# Altium PCB Arduino mega 2650  custom shield.pcbdoc
Units mm, origin at the board's own origin, x right, y up, seen from the top; angles counter-clockwise.
Board outline 114.55 x 86.11 mm, 2 copper layers (Top Layer, Bottom Layer); 28 components, 26 nets, 179 pads, 51 vias.
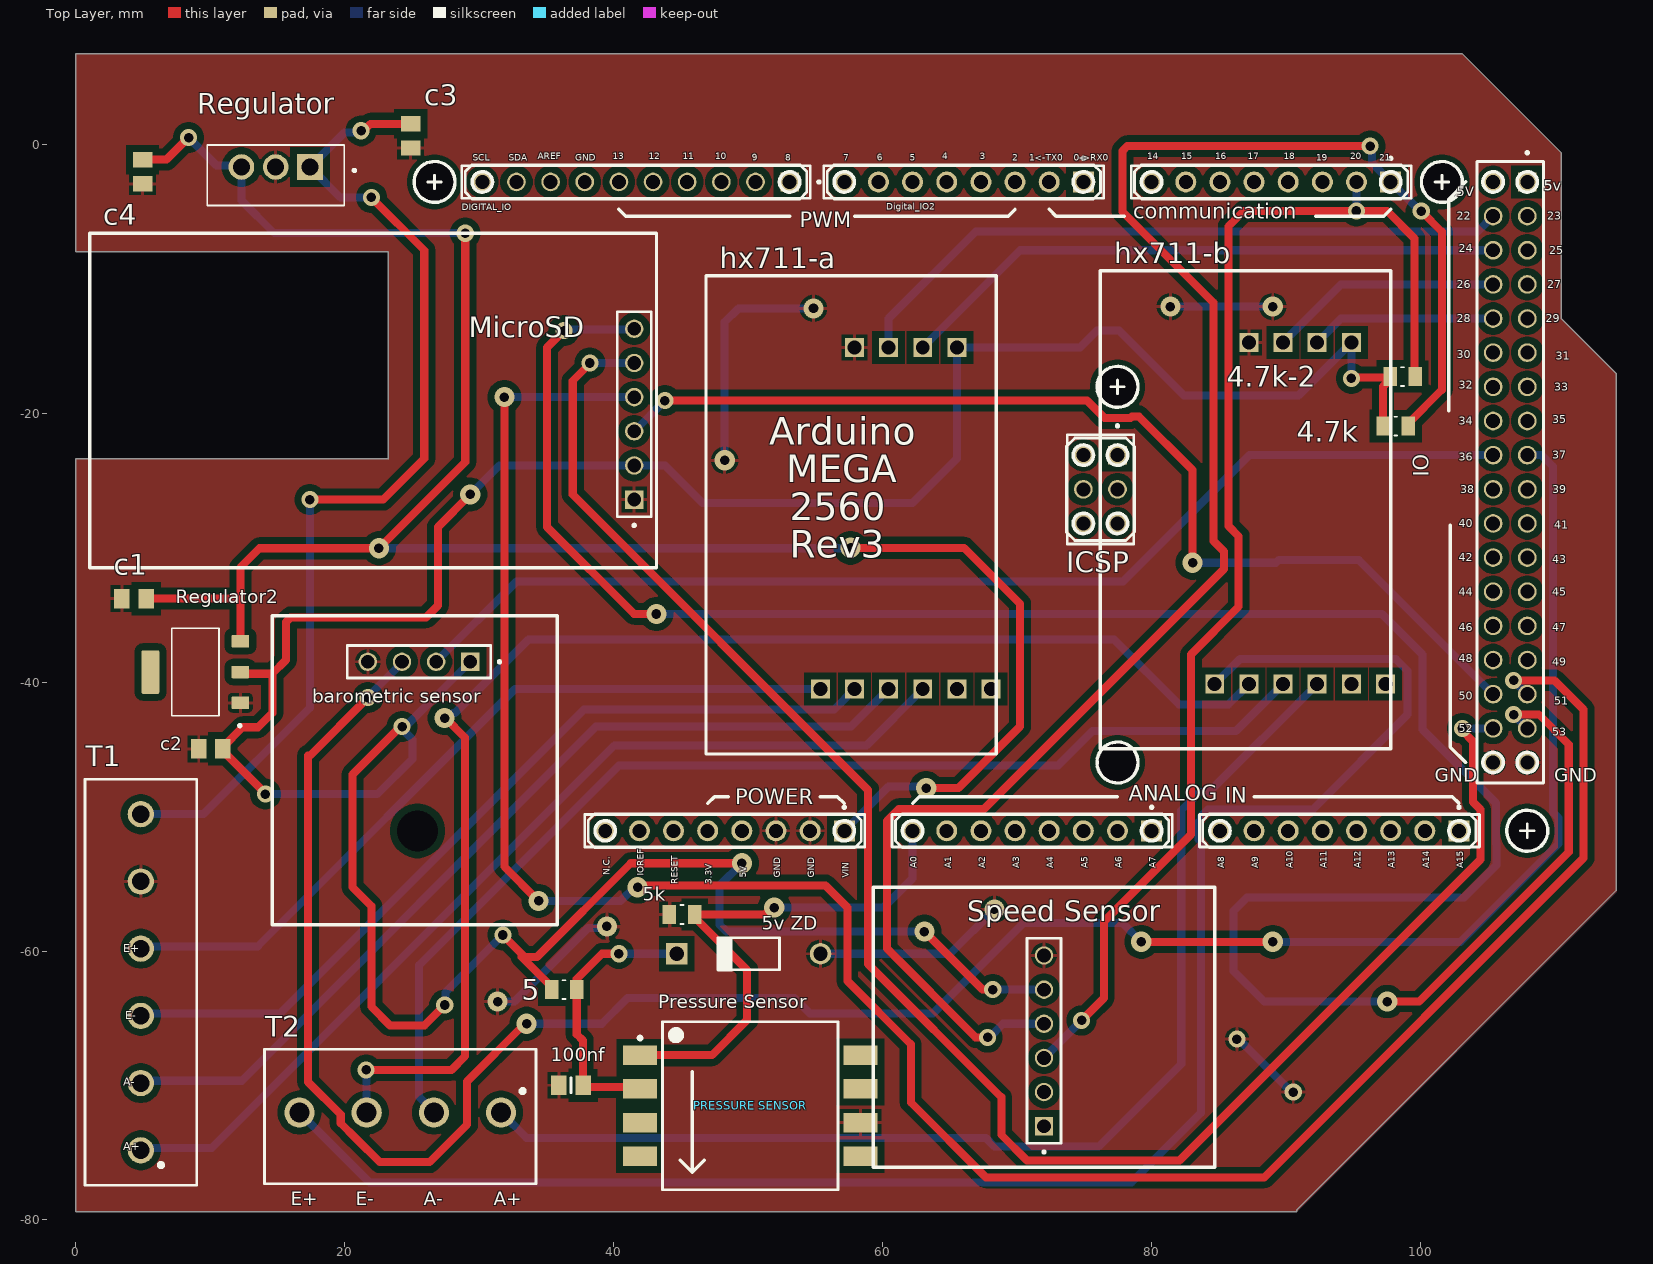
[diagram p0: Top Layer view]
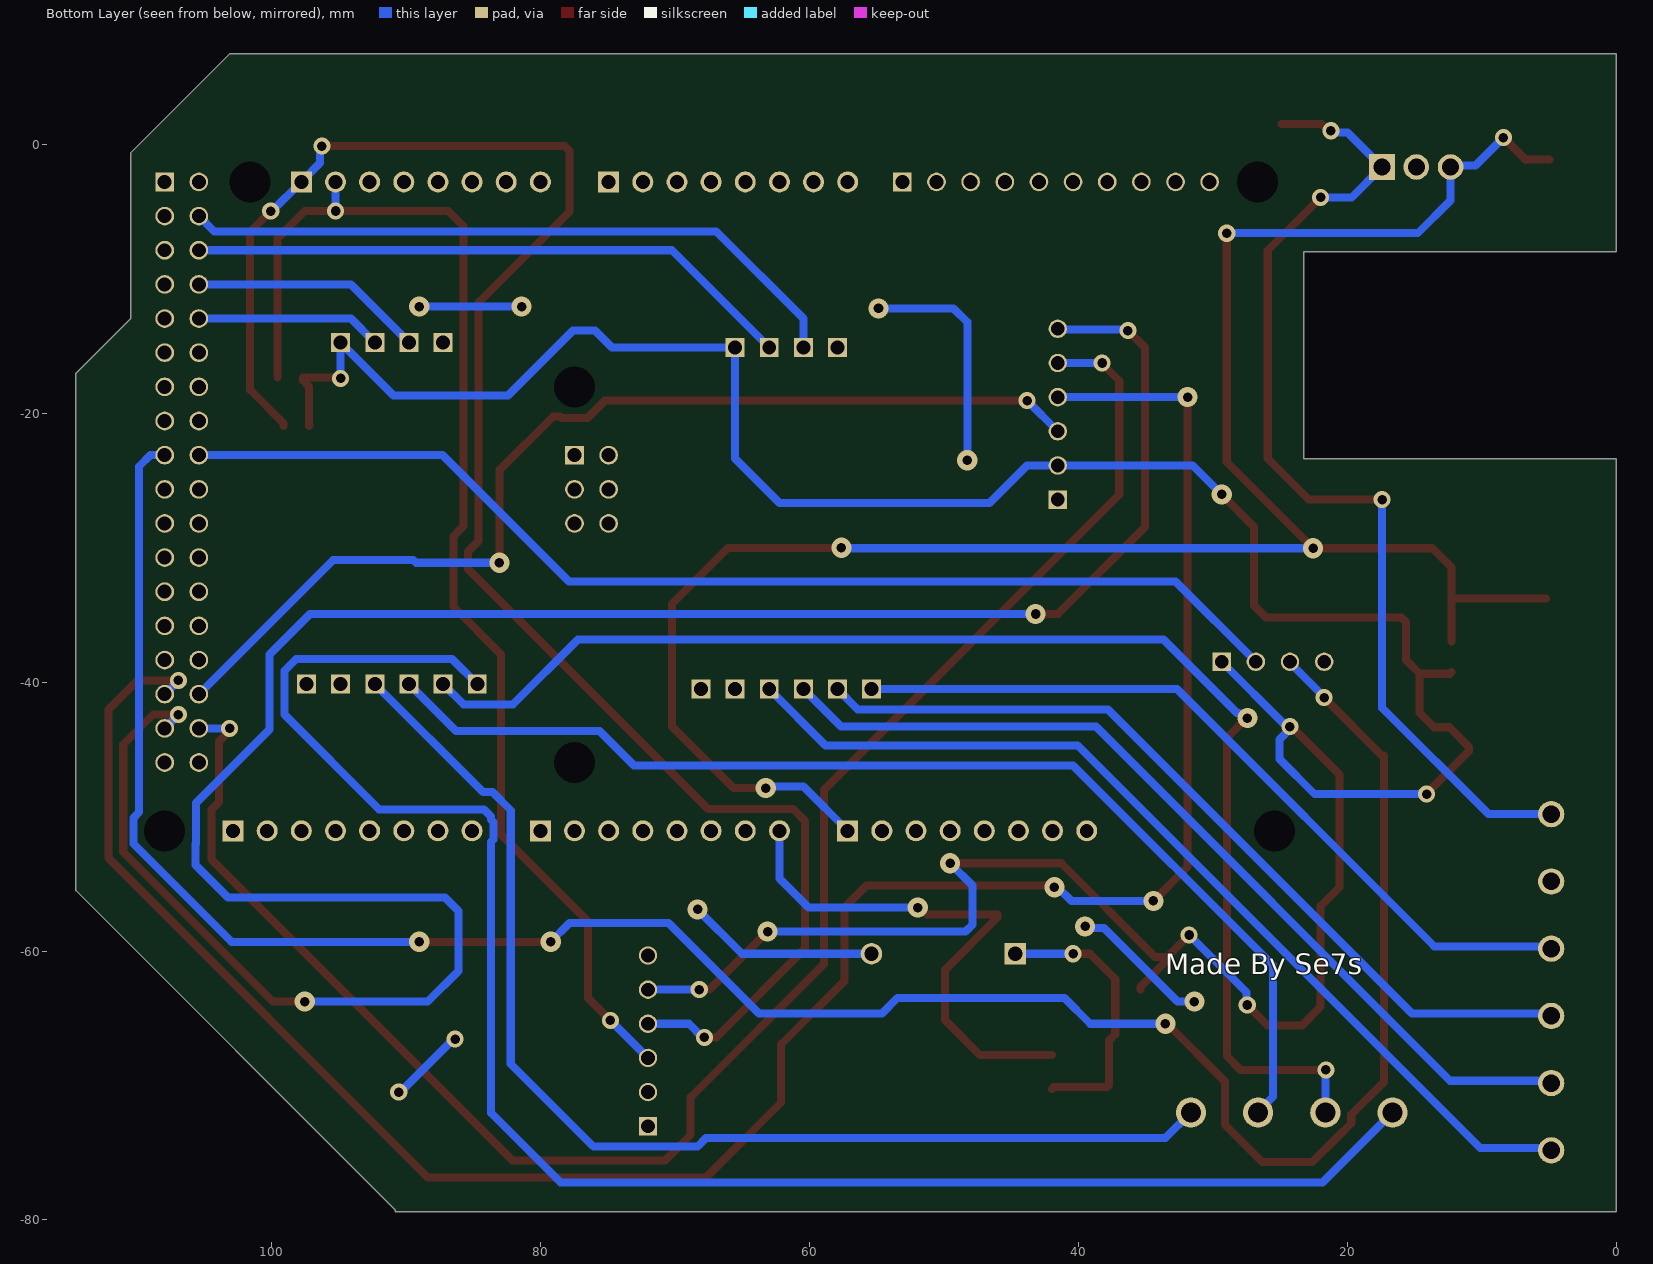
[diagram p1: Bottom Layer view, seen from below]
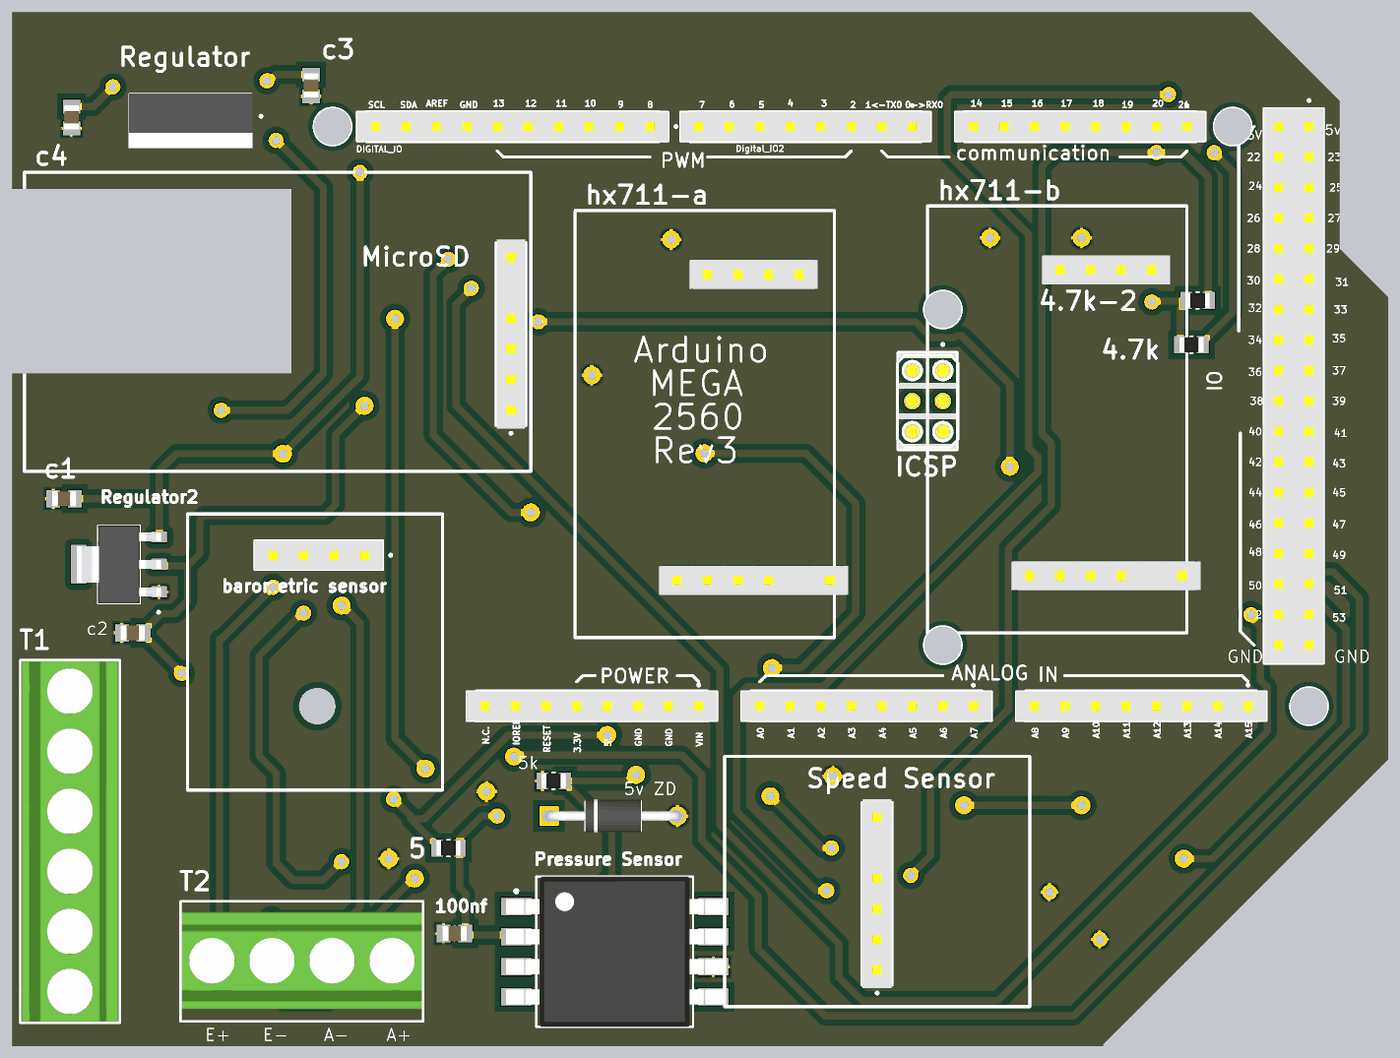
[diagram p2: 3D render of the assembled board from above, using the file's embedded part models]

## Layer stack, top to bottom
Top Solder: solder mask 0.0102, Solder Resist, Dk 3.5
Top Layer: signal copper 0.0356
Dielectric1: dielectric 0.32, FR-4, Dk 4.8
Bottom Layer: signal copper 0.0356
Bottom Solder: solder mask 0.0102, Solder Resist, Dk 3.5

## Board outline
0,6.731 103.124,6.731 110.49,-0.635 110.49,-12.948 110.484,-12.954 114.548,-17.018 114.554,-17.018 114.554,-55.499 90.805,-79.248 90.805,-79.375 0,-79.375 0,-23.368 23.241,-23.368 23.241,-8.001 0,-8.001

## Design rules (kind name [scope] priority, off if disabled: settings)
Clearance [All] p1: gap=0.5 ignorepadtopadclearanceinfootprint=FALSE
PolygonConnect [All] p1: connectstyle=Relief reliefconductorwidth=0.254 reliefentries=4 polygonreliefangle="90 Angle" airgapwidth=0.254
RoutingVias [All] p1: holewidth=0.4 width=1.5 viastyle="Through Hole" minholewidth=0.4 minwidth=1.5 maxholewidth=0.4 maxwidth=1.5
SolderMaskExpansion [All] p1: expansion=0.102 istentingtop=FALSE
Width [All] p1: maxlimit=0.6 minlimit=0.6 preferedwidth=0.6 minimp=50.000000 maximp=50.000000 favimp=50.000000
30 further rules are at their usual default settings.

## Components (designator, comment, footprint, x,y, rotation, side; value= is the part's Value field where it differs from the comment)
4.7k "" RESC2012X60N 98.165,-20.955 r180 top
4.7k-2 "" RESC2012X60N 98.679,-17.272 r180 top
5 "" RESC2012X60N 36.316,-62.865 r0 top
5k "" RESC2012X60N 45.079,-57.277 r180 top
"5v ZD" "1N4734A_T50R" DIOAD1070W78L463D238P 50.032,-60.198 r0 top
100nf "" CAPC2012X140N 36.824,-69.977 r180 top
ANALOG "" SAMTEC_SSW-108-XX-X-S 71.12,-51.051 r180 top
"barometric sensor" "SSQ-104-01-T-S-LL" SAMTEC_SSQ-104-01-T-S-LL 25.521,-38.481 r180 top
c1 "22u" CAPC2012X140N 4.318,-33.782 r0 top
c2 "22u" CAPC2012X140N 10.033,-44.958 r0 top
c3 "0.33u" CAPC2012X140N 24.892,0.635 r90 top
c4 "0.1u" CAPC2012X140N 4.953,-2.032 r270 top
communication "" SAMTEC_SSW-108-XX-X-S 88.9,-2.791 r180 top
DIGITAL_IO "" SAMTEC_SSW-110-03-T-S 53.086,-2.791 r180 top
Digital_IO2 "" SAMTEC_SSW-108-XX-X-S 66.04,-2.791 r180 top
hx711-a "HX711A" HX711 84.576,-49.403 r90 top
hx711-b "HX711A" HX711 113.913,-49.022 r90 top
ICSP "" SAMTEC_SSW-103-03-T-D 77.47,-23.111 r90 top
IN "" SAMTEC_SSW-108-XX-X-S 93.98,-51.051 r180 top
IO "" SAMTEC_SSW-118-03-T-D 107.95,-2.791 r90 top
MicroSD "MTSW-106-12-L-S-790" SAMTEC_MTSW-106-12-L-S-790 41.523,-20.066 r270 top
POWER "SSW-108-XX-X-S" SAMTEC_SSW-108-XX-X-S 48.26,-51.051 r180 top
"PRESSURE SENSOR" "" SOP251P1810X750-8N 50.159,-71.501 r0 top
Regulator "Component_1" TO225P1040X460X1968-3 14.859,-2.286 r180 top
Regulator2 "AMS1117-5.0" SOT229P700X180-4N 8.89,-39.243 r90 top
"Speed Sensor" "MTSW-106-12-L-S-790" SAMTEC_MTSW-106-12-L-S-790 72.003,-66.675 r270 top
T1 "691241710006" 691241710006 4.826,-62.317 r90 top
T2 "691242710004" 691242710004 24.124,-72.009 r180 top

## Footprints (in the part's own frame and the unit in brackets; to place one, negate y for a bottom-side part, rotate by r counter-clockwise, add the part's x,y. Pads: shape width x height; smd on the part's side, far side on the other; paste and mask are expansions set on the pad)
691241710006 [mm]
  round 1.95 hole 1.3: 1(-12.5,0) 2(-7.5,0) 3(-2.5,0) 4(2.5,0) 5(7.5,0) 6(12.5,0)
  silkscreen extent -15.1,-4.15 15.1,4.15, body extent -14.99,-4.04 15.01,4.06, height 10
691242710004 [mm]
  round 2.25 hole 1.5: 1(-7.5,0) 2(-2.5,0) 3(2.5,0) 4(7.5,0)
  silkscreen extent -10.1,-4.7 10.1,5.3, body extent -10,-3.81 10,4.29, height 10
CAPC2012X140N [mm]
  rect 1.15x1.45 smd: 1(-0.9,0) 2(0.9,0)
  silkscreen extent 0,-0.55 0,0.55, body extent -1,-0.63 1,0.63, height 0.94
DIOAD1070W78L463D238P [mm]
  round 1.6 hole 1.06: A(5.35,0)
  rect 1.6x1.6 hole 1.06: C(-5.35,0)
  silkscreen extent -2.31,-1.3 2.3,1.2, body extent -5.69,-1.36 5.69,1.36, height 2.71
HX711 [mm]
  rect 1.408x1.408 / inner round 1.301 / far side rect 1.408x1.408 hole 1.04: 2(8.89,16.51) A+(8.89,21.59) A-(8.89,24.13) B-(8.89,19.05) DT(34.29,24.13) E+(8.89,29.21) E-(8.89,26.67) GND(34.29,26.67) SCK(34.29,21.59) VCC(34.29,19.05)
  body extent 7.62,14.99 35.5,30.73, height 8.51
RESC2012X60N [mm]
  rect 1x1.42 smd: 1(-0.935,0) 2(0.935,0)
  silkscreen extent -0.12,-0.7 0.12,0.7, body extent -1,-0.63 1,0.63, height 0.6
SAMTEC_MTSW-106-12-L-S-790 [mm]
  rect 1.37x1.37 / inner round 1.37 / far side rect 1.37x1.37 hole 1.02: 01(6.35,0)
  round 1.37 hole 1.02: 02(3.81,0) 03(1.27,0) 04(-1.27,0) 05(-3.81,0) 06(-6.35,0)
  silkscreen extent -7.62,-1.27 8.37,1.27, body extent -7.87,-1.21 7.87,1.21, height 8.51
SAMTEC_SSQ-104-01-T-S-LL [mm]
  rect 1.37x1.37 / inner round 1.37 / far side rect 1.37x1.37 hole 1.02: 01(-3.81,0)
  round 1.37 hole 1.02: 02(-1.27,0) 03(1.27,0) 04(3.81,0)
  silkscreen extent -6.08,-1.21 5.34,1.21, body extent -5.33,-1.21 5.33,1.21, height 8.51
SAMTEC_SSW-103-03-T-D [mm]
  rect 1.39x1.39 hole 1.04: 01(0,0)
  round 1.39 hole 1.04: 02(0,2.54) 03(-2.54,0) 04(-2.54,2.54) 05(-5.08,0) 06(-5.08,2.54)
  silkscreen extent -6.61,-1.21 2.27,3.75, body extent -6.6,-1.21 1.52,3.75, height 10.01
SAMTEC_SSW-108-XX-X-S [mm]
  rect 1.56x1.56 hole 1.04: 01(-8.89,0)
  round 1.56 hole 1.04: 02(-6.35,0) 03(-3.81,0) 04(-1.27,0) 05(1.27,0) 06(3.81,0) 07(6.35,0) 08(8.89,0)
  silkscreen extent -10.42,-1.85 10.42,1.2, body extent -10.41,-1.21 10.41,1.21, height 8.51
SAMTEC_SSW-110-03-T-S [mm]
  rect 1.39x1.39 hole 1.04: 01(0,0)
  round 1.39 hole 1.04: 02(2.54,0) 03(5.08,0) 04(7.62,0) 05(10.16,0) 06(12.7,0) 07(15.24,0) 08(17.78,0) 09(20.32,0) 10(22.86,0)
  silkscreen extent -2.27,-1.21 24.39,1.21, body extent -1.52,-1.21 24.38,1.21, height 8.51
SAMTEC_SSW-118-03-T-D [mm]
  rect 1.39x1.39 / inner round 1.39 / far side rect 1.39x1.39 hole 1.04: 01(0,0)
  round 1.39 hole 1.04: 02(0,2.54) 03(-2.54,0) 04(-2.54,2.54) 05(-5.08,0) 06(-5.08,2.54) 07(-7.62,0) 08(-7.62,2.54) 09(-10.16,0) 10(-10.16,2.54) 11(-12.7,0) 12(-12.7,2.54) 13(-15.24,0) 14(-15.24,2.54) 15(-17.78,0) 16(-17.78,2.54) 17(-20.32,0) 18(-20.32,2.54) 19(-22.86,0) 20(-22.86,2.54) 21(-25.4,0) 22(-25.4,2.54) 23(-27.94,0) 24(-27.94,2.54) 25(-30.48,0) 26(-30.48,2.54) 27(-33.02,0) 28(-33.02,2.54) 29(-35.56,0) 30(-35.56,2.54) 31(-38.1,0) 32(-38.1,2.54) 33(-40.64,0) 34(-40.64,2.54) 35(-43.18,0) 36(-43.18,2.54)
  silkscreen extent -44.71,-1.21 2.27,3.75, body extent -44.7,-1.21 1.52,3.75, height 8.51
SOP251P1810X750-8N [mm] "SOP, 8-Leads, Body 12.25x12.25mm, Pitch 2.51mm, IPC Medium Density"
  rect 2.55x1.45 smd: 1(8.2,-3.759) 2(8.2,-1.253) 3(8.2,1.253) 4(8.2,3.759) 5(-8.2,-3.759) 6(-8.2,-1.253) 7(-8.2,1.253) 8(-8.2,3.759)
  silkscreen extent -8.32,-6.25 6.53,6.25, body extent -9.05,-6.25 9.05,6.25, height 7.5
SOT229P700X180-4N [mm]
  rrect15% 0.93x1.31 smd: 1(-2.29,-3.345) 2(0,-3.345) 3(2.29,-3.345)
  rrect15% 3.24x1.31 smd: 4(0,3.345)
  silkscreen extent -4.09,-3.4 3.25,1.75, body extent -3.25,-3.5 3.25,3.5, height 1.8
TO225P1040X460X1968-3 [mm]
  rect 1.905x1.905 / inner round 1.905 / far side rect 1.905x1.905 hole 1.27: 1(-2.55,-0.605)
  round 1.905 hole 1.27: 2(0,-0.605) 3(2.55,-0.605)
  silkscreen extent -5.95,-2.25 5.1,2.25, body extent -5.15,-2.29 5.15,2.29, height 22.22

## Part data
4.7k 4.7k-2 5 5k: library part CR0805-FX-2001ELF, "Res 0805 2k 1% 125mW", Package="0805 Bourns", Check_prices=https://www.snapeda.com/parts/CR0805-FX-2001ELF/Bourns/view-part/?ref=eda, MF=Bourns, MP=CR0805-FX-2001ELF, SnapEDA_Link=https://www.snapeda.com/parts/CR0805-FX-2001ELF/Bourns/view-part/?ref=snap
"5v ZD": "1N4734 Series 1 W 5.6 V 10 uA Through Hole Zener Diode - DO-41", Package=None, Availability=Unavailable, MP=1N4734A_T50R, Price=None
100nf: library part LD052C153JAB2A, "Ceramic Capacitor", Package="0805 AVX", Availability="In Stock", Check_prices=https://www.snapeda.com/parts/LD052C153JAB2A/AVX/view-part/?ref=eda, MF=AVX, MP=LD052C153JAB2A, Price=None, SnapEDA_Link=https://www.snapeda.com/parts/LD052C153JAB2A/AVX/view-part/?ref=snap
ANALOG communication Digital_IO2 IN: library part SSW-108-XX-X-S, "8 Position Receptacle Connector Through Hole, Right Angle", Package=None, Availability=Bad, Check_prices=https://www.snapeda.com/parts/SSW-108-03-F-S/Samtec/view-part/3433832/?ref=eda, MF=Samtec, MP=SSW-108-03-F-S, Price=None, Purchase-URL=https://pricing.snapeda.com/search/part/SSW-108-03-F-S/?ref=eda, SnapEDA_Link=https://www.snapeda.com/parts/SSW-108-03-F-S/Samtec/view-part/3433832/?ref=snap
"barometric sensor": "4 Position Receptacle Connector 0.100 (2.54mm) Through Hole Tin", Package=None, Check_prices=https://www.snapeda.com/parts/SSQ-104-01-T-S-LL/Samtec/view-part/?ref=eda, MF=Samtec, MP=SSQ-104-01-T-S-LL, SnapEDA_Link=https://www.snapeda.com/parts/SSQ-104-01-T-S-LL/Samtec/view-part/?ref=snap
c1 c2 c3 c4: library part LD051A121KAB2A, "Ceramic Capacitor", Package="0805 AVX", Availability="In Stock", Check_prices=https://www.snapeda.com/parts/LD051A121KAB2A/AVX/view-part/?ref=eda, MF=AVX, MP=LD051A121KAB2A, Price=None, Purchase-URL=https://pricing.snapeda.com/search/part/LD051A121KAB2A/?ref=eda, SnapEDA_Link=https://www.snapeda.com/parts/LD051A121KAB2A/AVX/view-part/?ref=snap
DIGITAL_IO: library part SSW-110-03-T-S, Package=None, Availability=Unavailable, MF=Samtec, MP=SSW-110-03-T-S, Price=None
hx711-a hx711-b: Package=HX711, DeviceName=A, DeviceSetName=HX711, GateName_1=G$1, LibraryName=HX711, SymbolName_1=HX711
ICSP: library part SSW-103-03-T-D, "SSW Series .100 Tiger Buyâ„¢ Socket Strip", Package=None, Availability="In Stock", Check_prices=https://www.snapeda.com/parts/SSW-103-03-T-D/Samtec/view-part/?ref=eda, MF=Samtec, MP=SSW-103-03-T-D, Price=None, Purchase-URL=https://pricing.snapeda.com/search/part/SSW-103-03-T-D/?ref=eda, SnapEDA_Link=https://www.snapeda.com/parts/SSW-103-03-T-D/Samtec/view-part/?ref=snap
IO: library part SSW-118-03-T-D, "36 Position Receptacle Connector 0.100 (2.54mm) Through Hole, Right Angle Tin", Package=None, Availability="In Stock", Check_prices=https://www.snapeda.com/parts/SSW-118-03-T-D/Samtec/view-part/?ref=eda, MF=Samtec, MP=SSW-118-03-T-D, Price=None, Purchase-URL=https://pricing.snapeda.com/search/part/SSW-118-03-T-D/?ref=eda, SnapEDA_Link=https://www.snapeda.com/parts/SSW-118-03-T-D/Samtec/view-part/?ref=snap
MicroSD "Speed Sensor": "HEADER, 6 CONTACTS, 1 ROW, THROUGH HOLE, 2.54 MM; Connector Systems:Board-to-Board; Pitch Spacing:2.54mm; No. of Rows:1Rows; No. of Contacts:6Contacts; Contact Termination Type:Through Hole; Product Range:MTSW Series; Gender:Header RoHS Compliant: Yes", Package=None, Availability="In Stock", Check_prices=https://www.snapeda.com/parts/MTSW10612LS790/Samtec/view-part/?ref=eda, MF=Samtec, MP=MTSW10612LS790, Price=None, Purchase-URL=https://pricing.snapeda.com/search/part/MTSW10612LS790/?ref=eda, SnapEDA_Link=https://www.snapeda.com/parts/MTSW10612LS790/Samtec/view-part/?ref=snap
POWER: "8 Position Receptacle Connector Through Hole, Right Angle", Package=None, Availability=Bad, Check_prices=https://www.snapeda.com/parts/SSW-108-03-F-S/Samtec/view-part/3433832/?ref=eda, MF=Samtec, MP=SSW-108-03-F-S, Price=None, Purchase-URL=https://pricing.snapeda.com/search/part/SSW-108-03-F-S/?ref=eda, SnapEDA_Link=https://www.snapeda.com/parts/SSW-108-03-F-S/Samtec/view-part/3433832/?ref=snap
"PRESSURE SENSOR": library part "PRESSURE SENSOR"
Regulator2: "1A LOW DROPOUT VOLTAGE REGULATOR", Package="SOT-223 Seeed Technology", Availability="Not in stock", Check_prices=https://www.snapeda.com/parts/AMS1117-5.0/ams/view-part/?ref=eda, MF=ams, MP=AMS1117-5.0, Price=None, SnapEDA_Link=https://www.snapeda.com/parts/AMS1117-5.0/ams/view-part/?ref=snap
T1: "6 Position Wire to Board Terminal Block Horizontal with Board 0.197 (5.00mm) Through Hole", Package=None, Check_prices=https://www.snapeda.com/parts/691241710006/Wurth+Elektronik/view-part/?ref=eda, MF="WÃ¼rth Elektronik", MP=691241710006, SnapEDA_Link=https://www.snapeda.com/parts/691241710006/Wurth+Elektronik/view-part/?ref=snap
T2: "4 Position Wire to Board Terminal Block Horizontal with Board 0.197 (5.00mm) Through Hole", Package=None, Check_prices=https://www.snapeda.com/parts/691242710004/Wurth+Elektronik/view-part/?ref=eda, MF="Wurth Electronics", MP=691242710004, SnapEDA_Link=https://www.snapeda.com/parts/691242710004/Wurth+Elektronik/view-part/?ref=snap

## Free pads (board coordinates)
  round 1.524 hole 3.048 unplated: 1(107.95,-51.051) 2(25.4,-51.054) 3(26.67,-2.791) 4(101.6,-2.791) 5(77.47,-18.031) 6(77.47,-45.971)

## Via types
v1: diameter 1.27, hole 0.711, Top Layer to Bottom Layer, 27 vias
v2: diameter 1.5, hole 0.711, Top Layer to Bottom Layer, 24 vias

## Nets (pads, with @x,y where several pads share a name; then routed paths per layer and width w, separated by ;. In a path a pad name is that pad's centre, name@x,y a point inside that pad or via, vN(x,y) a via of type N, cw(c..) or ccw(c..) an arc to the next point about the centre after c; other vN are vias at no path point)
+5: 4.7k-2.2 4.7k.2 5.1 "barometric sensor.01" "Speed Sensor.05" c2.2 hx711-a.VCC hx711-b.VCC MicroSD.02 Regulator2.2 | length 245.7
  Top Layer w0.6: Regulator2.2 12.362,-39.37 14.605,-39.37 ; v1@14.097,-48.387 v1(14.097,-48.329) 14.097,-48.272 10.933,-45.108 c2.2 10.933,-44.808 12.393,-43.348 13.548,-43.348 14.605,-42.291 14.605,-39.37 ; v1(24.257,-43.307) 24.13,-43.307 20.574,-46.863 20.574,-55.245 21.971,-56.642 21.971,-64.132 23.368,-65.529 25.911,-65.529 v1(27.432,-64.008) ; v2(29.331,-26.035) 29.331,-26.041 26.924,-28.448 26.924,-34.284 26.029,-35.179 15.972,-35.179 15.621,-35.53 15.621,-38.354 14.605,-39.37 ; v1(31.75,-58.801) 33.159,-60.21 33.159,-60.433 ; 5.1 35.381,-62.655 33.159,-60.433 ; v2(49.53,-53.461) 49.524,-53.467 41.269,-53.467 34.302,-60.433 33.159,-60.433 ; v2(63.113,-58.547) 67.431,-62.865 v1(68.193,-62.865) ; v1(94.869,-17.399) 94.932,-17.335 97.681,-17.335 97.681,-17.545 97.23,-17.996 4.7k.2 4.7k.2@97.166,-20.892
  Bottom Layer w0.6: v1(14.097,-48.329) 22.41,-48.329 25.024,-45.715 25.024,-44.256 24.257,-43.488 v1(24.257,-43.307) 24.385,-43.179 24.633,-43.179 29.331,-38.481 ; v1(27.432,-64.008) 27.473,-63.967 27.473,-63.078 v1(31.75,-58.801) ; v2(29.331,-26.035) 31.49,-23.876 MicroSD.02 43.809,-23.876 46.603,-26.67 62.224,-26.67 65.526,-23.368 hx711-a.VCC 74.67,-15.113 75.94,-13.843 77.591,-13.843 82.417,-18.669 90.926,-18.669 hx711-b.VCC 94.863,-17.393 v1(94.869,-17.399) ; v2(49.53,-53.461) 47.873,-55.118 47.873,-58.039 48.381,-58.547 v2(63.113,-58.547) ; v1(68.193,-62.865) 72.003,-62.865
+12: c3.2 Regulator.1 T1.6 | length 76.5
  Top Layer w0.6: v1(17.399,-26.416) 22.86,-26.416 25.908,-23.368 25.908,-7.874 v1(21.971,-3.937) ; v1(21.209,1.016) 21.39,1.016 21.909,1.535 c3.2
  Bottom Layer w0.6: T1.6 4.84,-49.803 9.5,-49.803 17.399,-41.904 v1(17.399,-26.416) ; v1(21.209,1.016) 21.081,0.888 19.978,0.888 Regulator.1 19.665,-3.937 v1(21.971,-3.937)
A+1: hx711-a.A+ T1.1 | length 72.4
  Bottom Layer w0.6: T1.1 5,-74.643 10.103,-74.643 40.042,-44.704 58.795,-44.704 hx711-a.A+
A+2: hx711-b.A+ T2.1 | length 87.1
  Bottom Layer w0.6: T2.1 33.529,-73.914 67.685,-73.914 68.32,-74.549 76.067,-74.549 82.212,-68.404 82.212,-49.527 83.566,-48.172 84.282,-48.172 hx711-b.A+
A-1: hx711-a.A- T1.2 | length 67.8
  Bottom Layer w0.6: T1.2 5,-69.643 12.355,-69.643 38.691,-43.307 57.652,-43.307 hx711-a.A-
A-2: hx711-b.A- T2.2 | length 84.3
  Bottom Layer w0.6: T2.2 26.624,-71.929 25.527,-70.832 25.527,-61.048 40.385,-46.19 73.049,-46.19 75.616,-43.624 86.291,-43.624 hx711-b.A-
AD0: 5k.1 "PRESSURE SENSOR.8" ANALOG.08 | length 39.4
  Top Layer w0.6: 41.959,-67.742 47.314,-67.742 49.925,-65.131 49.925,-61.398 46.014,-57.487 5k.1 51.248,-57.277 51.756,-56.769 v2(51.937,-56.769)
  Bottom Layer w0.6: v2(51.937,-56.769) 60.065,-56.769 62.224,-54.61 62.224,-51.057 ANALOG.08
D36: "barometric sensor.02" IO.18 | length 85
  Bottom Layer w0.6: 26.791,-38.481 32.76,-32.512 77.888,-32.512 87.29,-23.111 IO.18
D37: "barometric sensor.03" IO.17 | length 174.4
  Top Layer w0.6: v1(21.717,-41.148) 17.399,-45.466 17.266,-45.466 17.266,-69.723 19.699,-72.156 19.699,-72.806 20.827,-73.934 20.842,-73.934 22.6,-75.692 26.312,-75.692 29.092,-72.913 29.092,-69.696 33.383,-65.405 v2(33.522,-65.405) ; v2(79.242,-59.309) v2(89.021,-59.309)
  Bottom Layer w0.6: v1(21.717,-41.148) 21.717,-41.081 24.251,-38.548 24.251,-38.481 ; v2(33.522,-65.405) 39.11,-65.405 41.015,-63.5 53.461,-63.5 54.604,-64.643 63.748,-64.643 70.479,-57.912 77.845,-57.912 v2(79.242,-59.309) ; v2(89.021,-59.309) 102.978,-59.309 110.274,-52.013 110.274,-50.088 109.849,-49.663 109.849,-23.941 109.019,-23.111 IO.17
D50: IO.32 MicroSD.03 | length 78.2
  Top Layer w0.6: v1(43.809,-19.05) 75.203,-19.05 76.507,-20.355 78.433,-20.355 78.558,-20.229 79.055,-20.229 83.052,-24.225 v2(83.052,-31.115)
  Bottom Layer w0.6: MicroSD.03 v1(43.809,-19.05) ; v2(83.052,-31.115) 89.274,-31.115 89.465,-30.924 95.443,-30.924 IO.32
D51: IO.31 MicroSD.04 | length 169.7
  Top Layer w0.6: v2(31.871,-18.796) 31.871,-53.721 v2(34.411,-56.261) ; v2(41.777,-55.245) 41.904,-55.118 55.747,-55.118 57.398,-56.769 57.398,-62.23 62.097,-66.929 62.097,-71.247 67.685,-76.835 88.386,-76.835 112.135,-53.086 112.135,-42.037 109.967,-39.869 v1(106.928,-39.869) ; IO.31@107.736,-40.891 IO.31
  Bottom Layer w0.6: v2(31.871,-18.796) 35.446,-18.796 MicroSD.04 ; v2(34.411,-56.261) 40.517,-56.261 41.533,-55.245 v2(41.777,-55.245) ; v1(106.928,-39.869) IO.31
D52: IO.34 MicroSD.05 | length 132.7
  Top Layer w0.6: v1(38.221,-16.256) 38.221,-16.311 36.951,-17.581 36.951,-26.035 58.922,-48.006 58.922,-60.96 68.828,-70.866 68.828,-73.66 70.733,-75.565 82.079,-75.565 104.47,-53.174 104.47,-49.466 103.911,-48.907 103.911,-44.409 103.118,-43.615 v1(103.118,-43.434)
  Bottom Layer w0.6: v1(38.221,-16.256) MicroSD.05 ; v1(103.118,-43.434) 103.12,-43.432 105.408,-43.432 IO.34
D53: IO.33 MicroSD.06 | length 178.3
  Top Layer w0.6: v1(36.316,-13.843) 35.046,-15.113 35.046,-28.448 41.523,-34.925 v2(43.174,-34.925) ; MicroSD.06@41.459,-13.779 MicroSD.06 ; v2(97.53,-63.754) 99.911,-63.754 111.035,-52.63 111.035,-44.62 108.8,-42.386 106.951,-42.386 v1(106.928,-42.409)
  Bottom Layer w0.6: v1(36.316,-13.843) 36.379,-13.779 41.459,-13.779 MicroSD.06 ; v2@42.793,-34.925 v2(43.174,-34.925) 97.149,-34.925 100.154,-37.93 100.154,-43.518 105.626,-48.99 105.626,-52.013 105.658,-52.045 105.658,-53.594 103.245,-56.007 87.116,-56.007 86.1,-57.023 86.1,-61.468 88.386,-63.754 v2(97.53,-63.754) ; v1(106.928,-42.409) IO.33
DT-1: hx711-a.DT IO.04 | length 50.3
  Bottom Layer w0.6: hx711-a.DT 60.446,-12.96 66.929,-6.477 104.264,-6.477 IO.04
DT-2: hx711-b.DT IO.08 | length 17.4
  Bottom Layer w0.6: hx711-b.DT 94.104,-10.411 IO.08
E+1: hx711-a.E+ T1.4 | length 58.5
  Bottom Layer w0.6: T1.4 5,-59.643 13.524,-59.643 32.654,-40.513 hx711-a.E+
E+2: hx711-b.E+ T2.4 | length 130.8
  Bottom Layer w0.6: T2.4 21.831,-77.216 78.498,-77.216 83.687,-72.027 83.687,-51.882 83.51,-51.705 83.51,-50.396 83.687,-50.219 83.687,-49.98 84.201,-49.466 91.999,-49.466 99.054,-42.411 99.054,-39.147 98.171,-38.264 86.571,-38.264 hx711-b.E+
E-1: hx711-a.E- T1.3 | length 63.1
  Bottom Layer w0.6: T1.3 5,-64.643 15.176,-64.643 37.802,-42.017 56.402,-42.017 hx711-a.E-
E-2: hx711-b.E- T2.3 | length 101.7
  Top Layer w0.6: v1(21.584,-68.834) 27.934,-68.834 28.95,-67.818 28.95,-44.126 27.496,-42.672 v2(27.426,-42.672)
  Bottom Layer w0.6: v1(21.584,-68.834) 21.604,-68.854 21.604,-71.989 T2.3 ; v2(27.426,-42.672) 27.669,-42.672 28.046,-42.296 28.183,-42.296 33.662,-36.816 77.216,-36.816 82.042,-41.642 85.732,-41.642 hx711-b.E-
GND: 5k.2 100nf.2 "5v ZD.A" "barometric sensor.04" "PRESSURE SENSOR.2" "Speed Sensor.06" c1.1 c2.1 c3.1 c4.2 hx711-a.GND hx711-b.GND IO.35 IO.36 MicroSD.01 POWER.02 POWER.03 Regulator2.1 Regulator.2 T1.5 | length 55.5
  Bottom Layer w0.6: v2(31.363,-63.754) 32.633,-63.754 38.099,-58.288 39.369,-58.288 v2(39.491,-58.166) ; v2(48.254,-23.495) 48.254,-13.208 49.27,-12.192 v2(54.858,-12.192) ; 55.382,-60.198 65.018,-60.198 v2(68.32,-56.896) ; v2(81.401,-12.065) v2(89.021,-12.065) ; v1(86.354,-66.548) 86.481,-66.548 90.418,-70.485 v1(90.545,-70.485)
Net5_2: 5.2 100nf.1 "5v ZD.C" "PRESSURE SENSOR.7" | length 20.7
  Top Layer w0.6: v1(40.38,-60.198) 39.116,-60.198 37.251,-62.063 5.2 37.251,-66.188 37.724,-66.661 100nf.1 37.859,-70.112 41.823,-70.112 41.959,-70.248
  Bottom Layer w0.6: v1(40.38,-60.198) 44.682,-60.198
SCK-1: hx711-a.SCK IO.06 | length 45.4
  Bottom Layer w0.6: hx711-a.SCK 70.228,-7.871 IO.06
SCK-2: hx711-b.SCK IO.10 | length 13.8
  Bottom Layer w0.6: hx711-b.SCK 94.104,-12.951 IO.10
SCL: 4.7k.1 "Speed Sensor.04" communication.01 | length 134.2
  Top Layer w0.6: v1(67.812,-66.421) 66.923,-66.421 60.319,-59.817 60.319,-50.31 61.2,-49.429 67.537,-49.429 85.382,-31.584 85.382,-30.276 84.607,-29.501 84.607,-11.772 77.845,-5.01 77.845,-0.478 78.196,-0.127 v1(96.26,-0.127) ; 4.7k.1 99.1,-20.745 101.594,-18.251 101.594,-6.491 100.07,-4.967 v1@100.07,-4.953 ; v1@99.961,-4.961 v1(100.064,-4.961)
  Bottom Layer w0.6: v1(67.812,-66.421) 67.951,-66.421 68.967,-65.405 72.003,-65.405 ; v1(96.26,-0.127) 96.388,-0.255 96.388,-1.389 communication.01 99.961,-4.961 v1(100.064,-4.961)
SDA: 4.7k-2.1 "Speed Sensor.03" communication.02 | length 96
  Top Layer w0.6: v1(74.797,-65.151) 76.466,-63.482 76.466,-57.785 82.925,-51.326 82.925,-37.94 86.482,-34.383 86.482,-29.146 85.725,-28.389 85.725,-6.09 86.862,-4.953 v1(95.244,-4.953) 97.53,-4.953 99.568,-6.991 4.7k-2.1@99.568,-17.319 ; communication.02@95.25,-2.942 communication.02
  Bottom Layer w0.6: 72.003,-67.945 v1(74.797,-65.151) ; v1(95.244,-4.953) 95.247,-4.95 95.247,-2.794 communication.02
Vin: c1.2 c4.1 POWER.01 Regulator2.3 Regulator.3 | length 153.6
  Top Layer w0.6: c4.1 6.742,-1.132 v1(8.382,0.508) ; c1.2 12.108,-33.782 12.235,-33.909 ; Regulator2.3 12.235,-33.909 ; v1(28.956,-6.604) 28.956,-23.616 v2(22.536,-30.035) 13.652,-30.035 12.235,-31.453 12.235,-33.909 ; v2(57.62,-30.004) 66.066,-30.004 70.225,-34.163 70.225,-43.307 65.653,-47.879 v2(63.24,-47.879)
  Bottom Layer w0.6: v1(8.382,0.508) 10.457,-1.567 12.195,-1.567 Regulator.3 12.309,-4.159 14.754,-6.604 v1(28.956,-6.604) ; v2(22.536,-30.035) 57.588,-30.035 v2(57.62,-30.004) v2@57.652,-29.972 ; POWER.01 60.447,-47.753 63.114,-47.753 v2(63.24,-47.879)
pads on no net: "PRESSURE SENSOR.1" "PRESSURE SENSOR.3" "PRESSURE SENSOR.4" "PRESSURE SENSOR.5" "PRESSURE SENSOR.6" "Speed Sensor.01" "Speed Sensor.02" ANALOG.01 ANALOG.02 ANALOG.03 ANALOG.04 ANALOG.05 ANALOG.06 ANALOG.07 communication.03 communication.04 communication.05 communication.06 communication.07 communication.08 Digital_IO2.01 Digital_IO2.02 Digital_IO2.03 Digital_IO2.04 Digital_IO2.05 Digital_IO2.06 Digital_IO2.07 Digital_IO2.08 DIGITAL_IO.01 DIGITAL_IO.02 DIGITAL_IO.03 DIGITAL_IO.04 DIGITAL_IO.05 DIGITAL_IO.06 DIGITAL_IO.07 DIGITAL_IO.08 DIGITAL_IO.09 DIGITAL_IO.10 hx711-a.2 hx711-a.B- hx711-b.2 hx711-b.B- ICSP.01 ICSP.02 ICSP.03 ICSP.04 ICSP.05 ICSP.06 IN.01 IN.02 IN.03 IN.04 IN.05 IN.06 IN.07 IN.08 IO.01 IO.02 IO.03 IO.05 IO.07 IO.09 IO.11 IO.12 IO.13 IO.14 IO.15 IO.16 IO.19 IO.20 IO.21 IO.22 IO.23 IO.24 IO.25 IO.26 IO.27 IO.28 IO.29 IO.30 POWER.04 POWER.05 POWER.06 POWER.07 POWER.08 Regulator2.4

## Polygon pours and split planes (outlines as drawn)
GND on Top Layer "NONET_L01_P-001" (solid, pour order 0): 0,6.731 0,-8.001 23.241,-8.001 23.241,-23.368 0,-23.368 0,-79.375 90.805,-79.375 114.554,-55.626 114.554,-17.018 110.49,-12.954 110.49,-0.635 103.124,6.731

## Silkscreen, mask and mechanical layers (free items; w line width, h text height)
Top Overlay:
  circle w0.254: c77.47,-23.111 r0.762
  circle w0.254: c57.15,-2.791 r0.762
  circle w0.254: c26.67,-2.791 r1.524
  circle w0.254: c77.47,-45.971 r1.524
  circle w0.254: c39.37,-51.051 r0.762
  circle w0.254: c80.01,-51.051 r0.762
  circle w0.254: c107.95,-45.971 r0.762
  circle w0.254: c107.95,-51.051 r1.524
  circle w0.254: c77.47,-28.191 r0.762
  circle w0.254: c97.79,-2.791 r0.762
  circle w0.254: c80.01,-2.791 r0.762
  circle w0.254: c77.47,-18.031 r1.524
  circle w0.254: c53.086,-2.791 r0.762
  circle w0.254: c62.23,-51.051 r0.762
  circle w0.254: c102.87,-51.051 r0.762
  circle w0.254: c74.93,-2.791 r0.762
  circle w0.254: c107.95,-2.791 r0.762
  circle w0.254: c74.93,-28.191 r0.762
  circle w0.254: c30.226,-2.791 r0.762
  circle w0.254: c74.93,-23.111 r0.762
  circle w0.254: c101.6,-2.791 r1.524
  circle w0.254: c57.15,-51.051 r0.762
  circle w0.254: c85.09,-51.051 r0.762
  circle w0.254: c105.41,-45.971 r0.762
  circle w0.254: c105.41,-2.791 r0.762
  lines w0.203: 26.162,-2.791 27.178,-2.791 ; 26.67,-3.299 26.67,-2.283 ; 76.962,-18.031 77.978,-18.031 ; 77.47,-18.539 77.47,-17.523 ; 101.092,-2.791 102.108,-2.791 ; 101.6,-3.299 101.6,-2.283 ; 107.442,-51.051 108.458,-51.051 ; 107.95,-51.559 107.95,-50.543 ; 28.956,-3.553 29.464,-4.061 53.848,-4.061 54.356,-3.553 54.356,-2.029 53.848,-1.521 29.464,-1.521 28.956,-2.029 28.956,-3.553 ; 38.1,-51.813 38.608,-52.321 57.912,-52.321 58.42,-51.813 58.42,-50.289 57.912,-49.781 38.608,-49.781 38.1,-50.289 38.1,-51.813 ; 55.88,-3.553 56.388,-4.061 75.692,-4.061 76.2,-3.553 76.2,-2.029 75.692,-1.521 56.388,-1.521 55.88,-2.029 55.88,-3.553 ; 60.96,-51.813 61.468,-52.321 80.772,-52.321 81.28,-51.813 81.28,-50.289 80.772,-49.781 61.468,-49.781 60.96,-50.289 60.96,-51.813 ; 73.66,-28.826 74.295,-29.461 78.105,-29.461 78.74,-28.826 78.74,-22.476 78.105,-21.841 74.295,-21.841 73.66,-22.476 73.66,-28.826 ; 78.74,-3.553 79.248,-4.061 98.552,-4.061 99.06,-3.553 99.06,-2.029 98.552,-1.521 79.248,-1.521 78.74,-2.029 78.74,-3.553 ; 83.82,-51.813 84.328,-52.321 103.632,-52.321 104.14,-51.813 104.14,-50.289 103.632,-49.781 84.328,-49.781 83.82,-50.289 83.82,-51.813
  lines w0.254: 40.386,-4.823 40.894,-5.331 53.086,-5.331 ; 46.99,-49.019 47.498,-48.511 48.514,-48.511 ; 55.372,-48.511 56.642,-48.511 57.15,-49.019 ; 57.912,-5.331 69.342,-5.331 69.85,-4.823 ; 62.23,-49.019 62.738,-48.511 77.47,-48.511 ; 72.39,-4.823 72.898,-5.331 77.978,-5.331 ; 87.63,-48.511 102.362,-48.511 102.87,-49.019 ; 92.202,-5.331 97.282,-5.331 97.79,-4.823 ; 102.102,-19.802 102.102,-4.067 103.378,-2.791 ; 102.229,-28.324 102.229,-44.821 103.378,-45.971 ; 1.016,-31.496 43.18,-31.496 43.18,-6.604 1.016,-6.604 1.016,-31.496 ; 14.605,-58.039 35.814,-58.039 35.814,-35.052 14.605,-35.052 14.605,-58.039 ; 46.863,-45.339 68.453,-45.339 68.453,-9.779 46.863,-9.779 46.863,-45.339 ; 59.309,-76.073 84.709,-76.073 84.709,-55.245 59.309,-55.245 59.309,-76.073 ; 76.2,-44.958 97.79,-44.958 97.79,-9.398 76.2,-9.398 76.2,-44.958
  text "AREF" at 34.335,-1.092 h0.5
  text "13" at 39.923,-1.092 h0.5
  text "12" at 42.59,-1.092 h0.5
  text "11" at 45.13,-1.092 h0.5
  text "10" at 47.543,-1.092 h0.5
  text "4" at 64.434,-1.092 h0.5
  text "3" at 67.228,-1.092 h0.5
  text "14" at 79.674,-1.092 h0.5
  text "15" at 82.214,-1.092 h0.5
  text "16" at 84.754,-1.092 h0.5
  text "17" at 87.167,-1.092 h0.5
  text "18" at 89.834,-1.092 h0.5
  text "20" at 94.787,-1.092 h0.5
  text "9" at 50.321,-1.204 h0.5 r5
  text "6" at 59.592,-1.204 h0.5 r5
  text "SCL" at 29.509,-1.219 h0.5
  text "SDA" at 32.176,-1.219 h0.5
  text "GND" at 37.129,-1.219 h0.5
  text "8" at 52.75,-1.219 h0.5
  text "7" at 57.068,-1.219 h0.5
  text "5" at 62.021,-1.219 h0.5
  text "2" at 69.641,-1.219 h0.5
  text "1<-TX0" at 70.911,-1.219 h0.5
  text "0->RX0" at 74.213,-1.219 h0.5
  text "19" at 92.247,-1.219 h0.5
  text "21" at 96.946,-1.219 h0.5
  text "5v" at 109.187,-3.456 h0.8
  text "5V" at 102.71,-3.837 h0.7
  text "22" at 102.71,-5.615 h0.6
  text "23" at 109.441,-5.615 h0.6
  text "PWM" at 53.848,-6.156 h1.14
  text "24" at 102.837,-8.028 h0.6
  text "25" at 109.568,-8.155 h0.6
  text "26" at 102.71,-10.695 h0.6
  text "27" at 109.441,-10.695 h0.6
  text "28" at 102.71,-13.235 h0.6
  text "29" at 109.314,-13.235 h0.6
  text "30" at 102.71,-15.902 h0.6
  text "31" at 110.076,-16.029 h0.6
  text "32" at 102.837,-18.188 h0.6
  text "33" at 109.949,-18.315 h0.6
  text "35" at 109.822,-20.728 h0.6
  text "34" at 102.837,-20.855 h0.6
  text "Arduino" at 51.562,-22.349 h2.03
  text "37" at 109.822,-23.395 h0.6
  text "36" at 102.837,-23.522 h0.6
  text "MEGA" at 52.832,-25.143 h2.03
  text "38" at 102.964,-25.935 h0.6
  text "39" at 109.822,-25.935 h0.6
  text "2560" at 53.086,-27.937 h2.03
  text "40" at 102.837,-28.475 h0.6
  text "41" at 109.949,-28.602 h0.6
  text "Rev3" at 53.086,-30.731 h2.03
  text "42" at 102.837,-31.015 h0.6
  text "43" at 109.822,-31.142 h0.6
  text "44" at 102.837,-33.555 h0.6
  text "45" at 109.822,-33.555 h0.6
  text "46" at 102.837,-36.222 h0.6
  text "47" at 109.822,-36.222 h0.6
  text "48" at 102.837,-38.508 h0.6
  text "49" at 109.822,-38.762 h0.6
  text "50" at 102.837,-41.302 h0.6
  text "51" at 109.949,-41.683 h0.6
  text "52" at 102.837,-43.715 h0.6
  text "53" at 109.822,-43.969 h0.6
  text "GND" at 101.059,-47.398 h1
  text "GND" at 109.949,-47.398 h1
  text "A0" at 62.547,-53.845 h0.5 r90
  text "A1" at 65.087,-53.845 h0.5 r90
  text "A2" at 67.627,-53.845 h0.5 r90
  text "A3" at 70.168,-53.845 h0.5 r90
  text "A4" at 72.707,-53.845 h0.5 r90
  text "A5" at 75.248,-53.845 h0.5 r90
  text "A6" at 77.787,-53.845 h0.5 r90
  text "A7" at 80.328,-53.845 h0.5 r90
  text "A8" at 85.407,-53.845 h0.5 r90
  text "A9" at 87.947,-53.845 h0.5 r90
  text "A10" at 90.487,-53.845 h0.5 r90
  text "A11" at 93.027,-53.845 h0.5 r90
  text "A12" at 95.567,-53.845 h0.5 r90
  text "A13" at 98.107,-53.845 h0.5 r90
  text "A14" at 100.647,-53.845 h0.5 r90
  text "A15" at 103.187,-53.845 h0.5 r90
  text "N.C." at 39.687,-54.353 h0.5 r90
  text "IOREF" at 42.227,-54.403 h0.5 r90
  text "5V" at 49.847,-54.53 h0.5 r90
  text "GND" at 52.387,-54.53 h0.5 r90
  text "GND" at 54.927,-54.53 h0.5 r90
  text "VIN" at 57.467,-54.53 h0.5 r90
  text "RESET" at 44.767,-55.028 h0.5 r90
  text "3.3V" at 47.307,-55.028 h0.5 r90
  text "E+" at 3.523,-60.098 h0.6
  text "E-" at 3.65,-65.051 h0.6
  text "A-" at 3.523,-70.004 h0.6
  text "A+" at 3.523,-74.83 h0.6
  text "E+" at 15.969,-78.894 h1
  text "E-" at 20.795,-78.894 h1
  text "A-" at 25.875,-78.894 h1
  text "A+" at 31.082,-78.894 h1
Bottom Overlay:
  text "Made By Se7s" at 33.522,-61.722 h1.52

## Text inside footprints (layer, text, board x,y; h text height)
hx711-a: Mechanical 7 "HX711" at 61.716,-32.893 h3.94 r90
hx711-b: Mechanical 7 "HX711" at 91.053,-32.512 h3.94 r90
"PRESSURE SENSOR": Top Overlay "Pressure Sensor" at 43.297,-64.266 h1